# Altium PCB roboARM_PCB_V1I1_1.PcbDoc (part 1 of 2)
Units mm, origin at the board's own origin, x right, y up, seen from the top; angles counter-clockwise.
Board outline 55 x 50 mm, 2 copper layers (Top Layer, Bottom Layer); 48 components, 40 nets, 193 pads, 2135 vias.
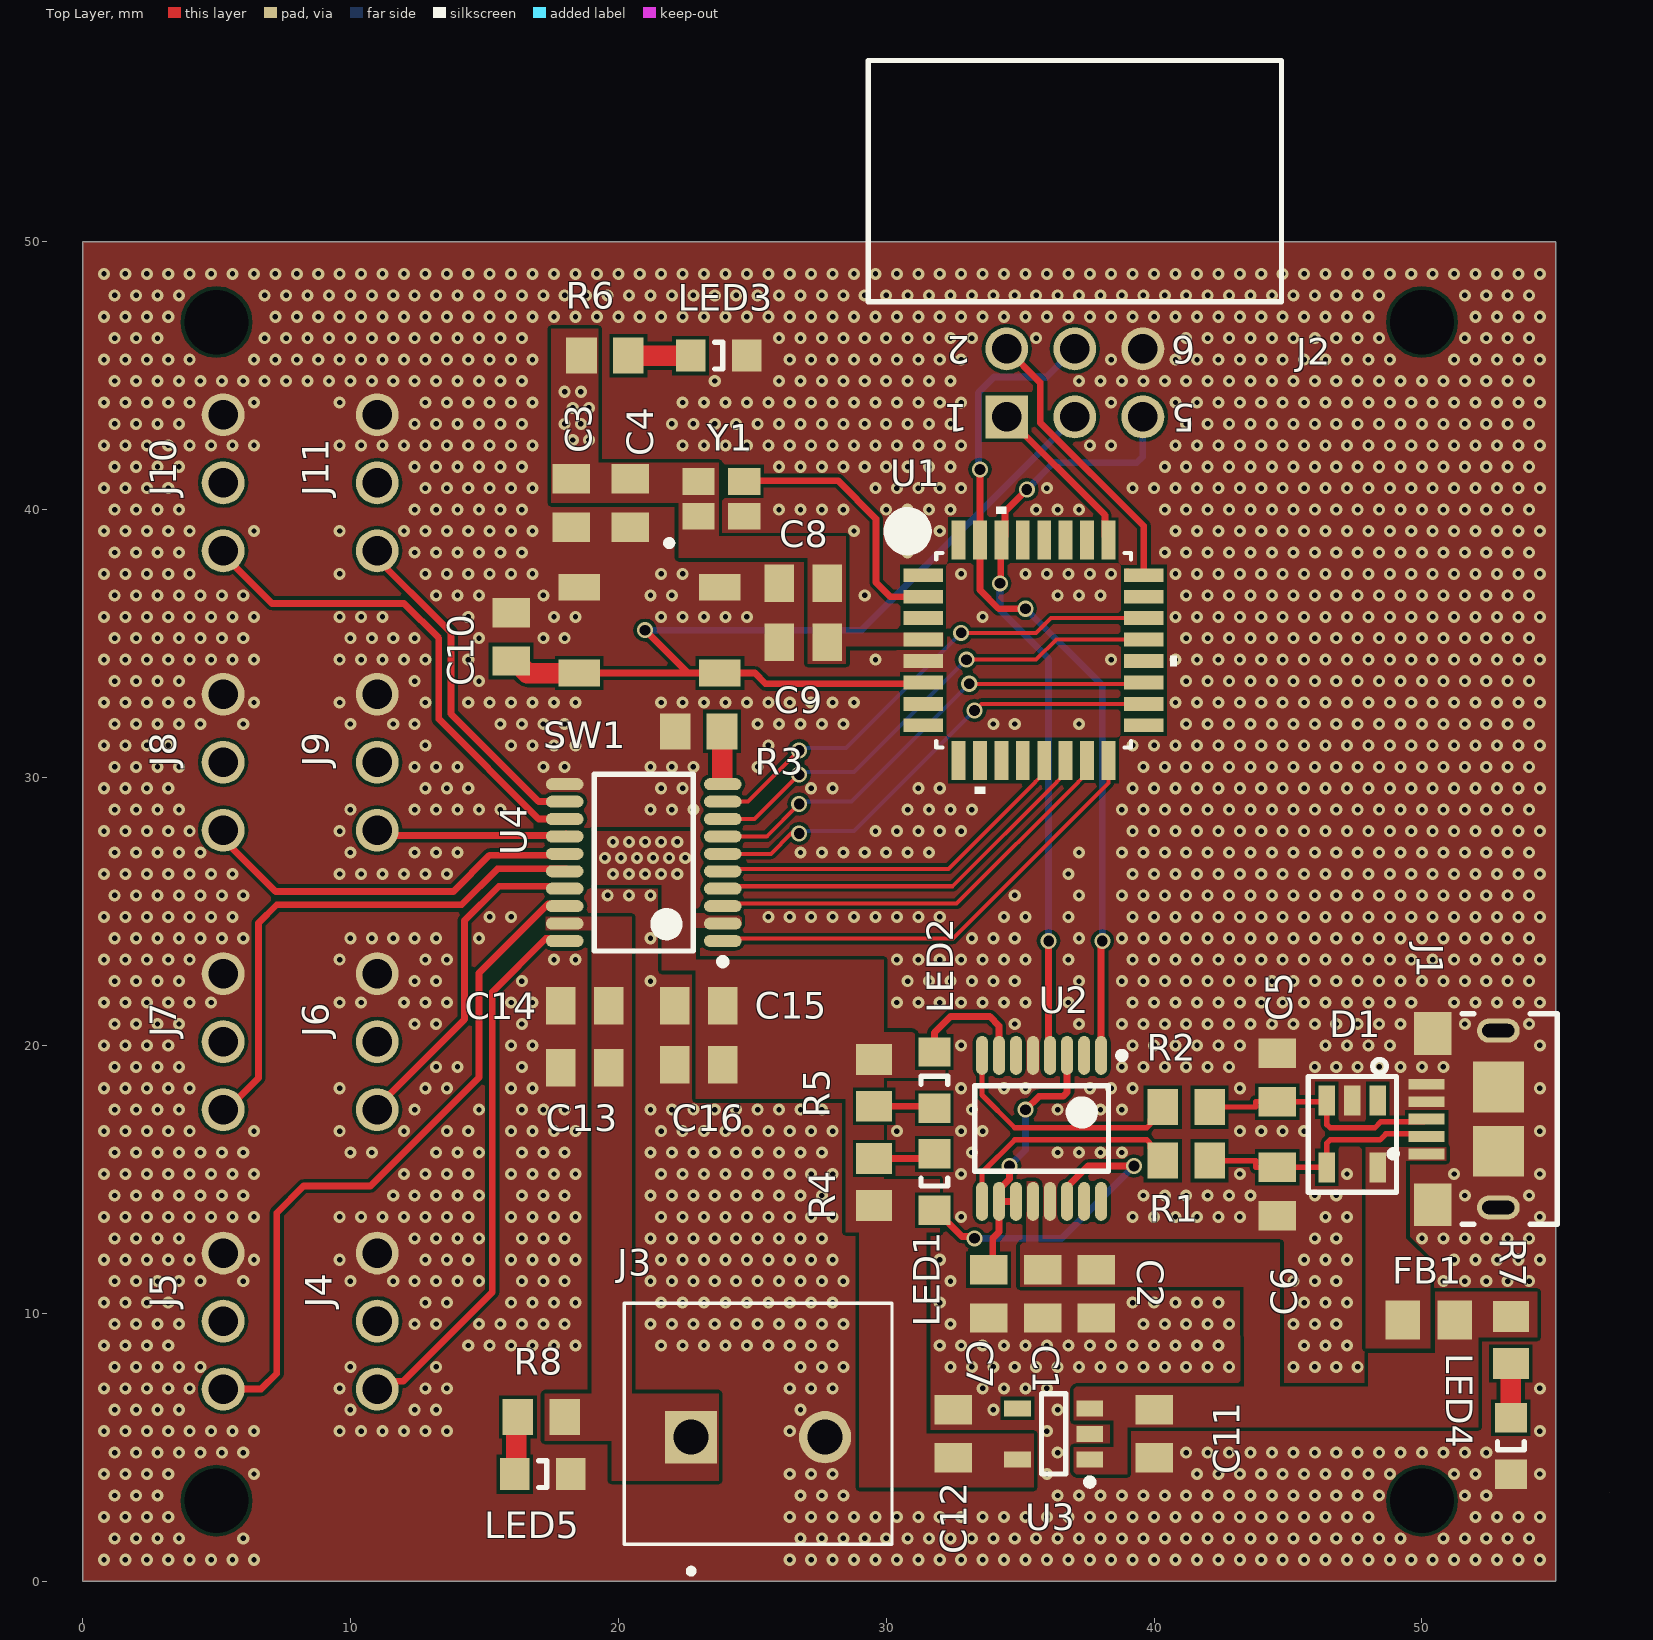
[diagram p0: Top Layer view]
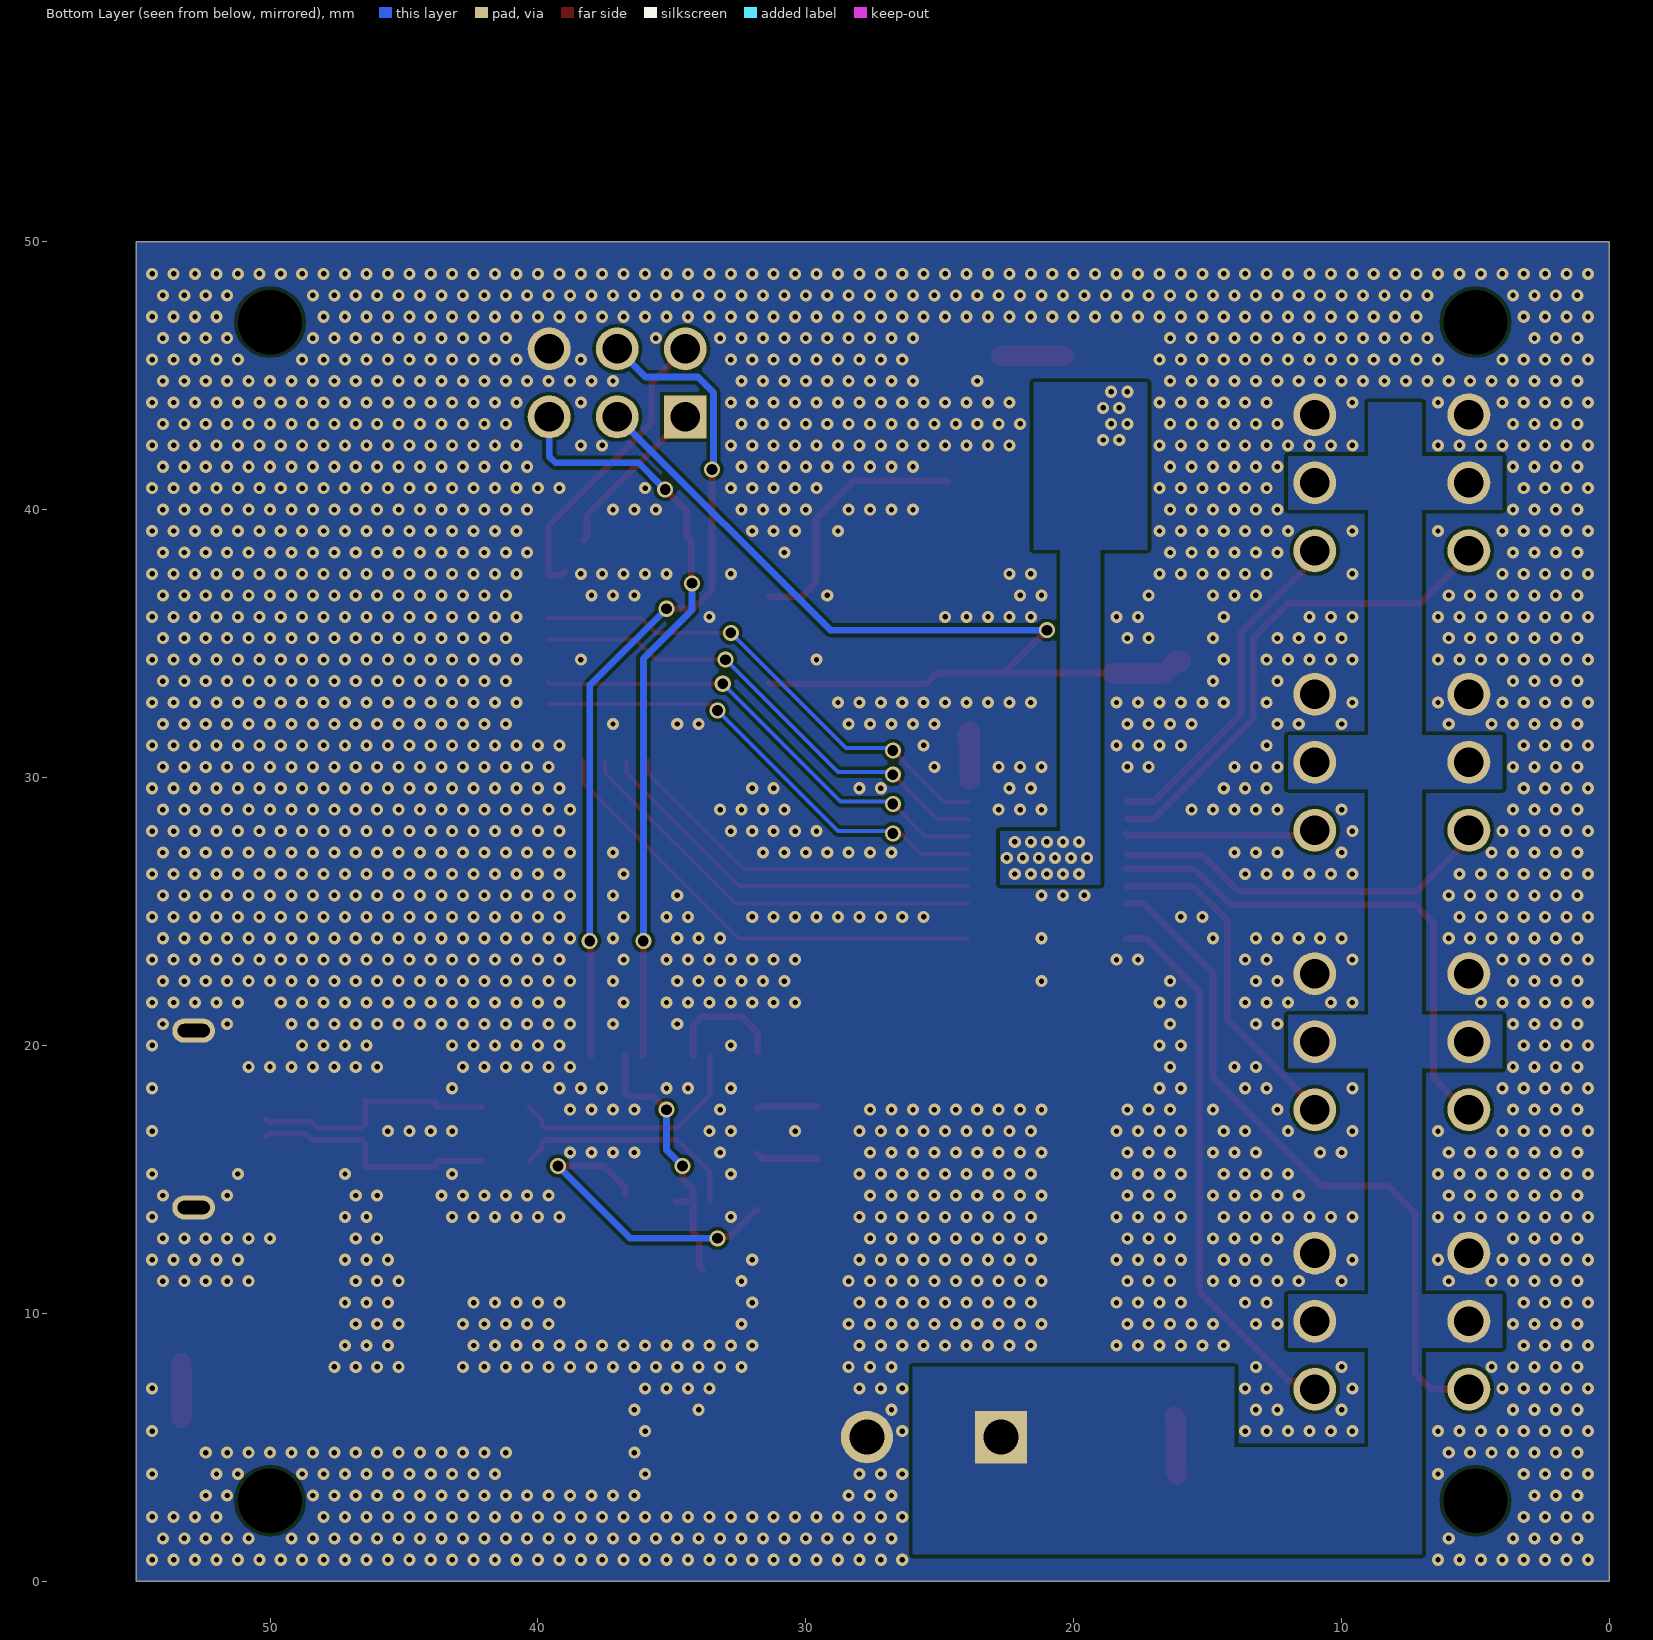
[diagram p1: Bottom Layer view, seen from below]
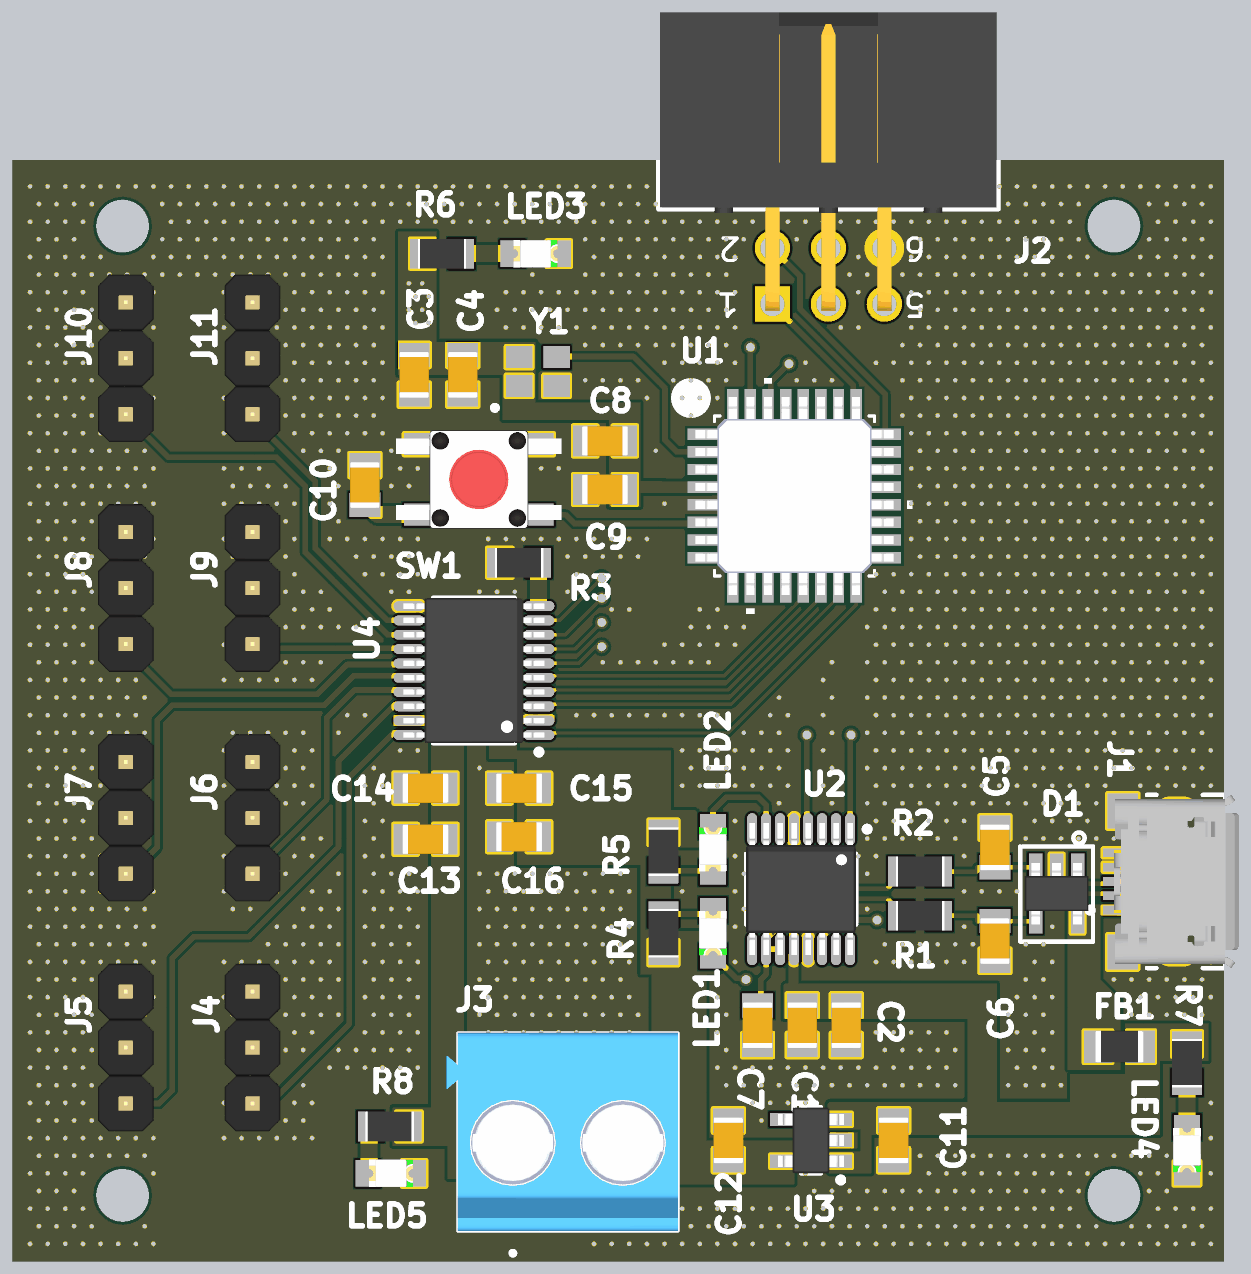
[diagram p2: 3D render of the assembled board from above, using the file's embedded part models]

## Layer stack, top to bottom
Top Solder: solder mask 0.0102, Solder Resist, Dk 3.5
Top Layer: signal copper 0.0356
Dielectric 1: dielectric 0.32, FR-4, Dk 4.8
Bottom Layer: signal copper 0.0356
Bottom Solder: solder mask 0.0102, Solder Resist, Dk 3.5

## Board outline
0,0 0,50 55,50 55,0

## Design rules (kind name [scope] priority, off if disabled: settings)
Clearance [All] p1: gap=0.127 ignorepadtopadclearanceinfootprint=FALSE
DiffPairsRouting [All] p1: maxlimit=0.254 minlimit=0.127 mostfreqgap=0.254 toplayer_minwidth=0.2 toplayer_maxwidth=0.9 toplayer_prefwidth=0.8 bottomlayer_minwidth=0.2 bottomlayer_maxwidth=0.9 bottomlayer_prefwidth=0.8 maxuncoupledlength=12.7
HoleSize [All] p1: absolutevalues=TRUE maxlimit=6.3 minlimit=0.2 maxpercent=80.000 minpercent=20.000
MinimumSolderMaskSliver [All] p1: minsoldermaskwidth=0.016
PlaneConnect [All] p1: planeconnectstyle=Direct reliefexpansion=0.508 reliefentries=4 reliefconductorwidth=0.254 reliefairgap=0.254
PolygonConnect [All] p1: connectstyle=Direct reliefconductorwidth=0.254 reliefentries=4 polygonreliefangle="90 Angle" airgapwidth=0.254
RoutingVias [All] p1: holewidth=0.4 width=0.6 viastyle="Through Hole" minholewidth=0.2 minwidth=0.45 maxholewidth=0.6 maxwidth=1.27
SilkToSilkClearance [All] p1: silktosilkclearance=0.18
SilkToSolderMaskClearance [IsPad] p1: minsilkscreentomaskgap=0.018 clearancetoexposedcopper=TRUE
SolderMaskExpansion [All] p1: expansion=0.102
Width [All] p1: maxlimit=0.768 minlimit=0.15 preferedwidth=0.254
24 further rules are at their usual default settings.

## Classes and differential pairs
differential pair USB: +USB_P -USB_N
differential pair USB_PRE: +USB_PRE_P -USB_PRE_N

## Components (designator, comment, footprint, x,y, rotation, side; value= is the part's Value field where it differs from the comment)
C1 "100nF" CAPC2012X10N 35.85,10.725 r90 top
C2 "4.7uF" CAPC2012X10N 37.85,10.725 r90 top
C3 "100nF" CAPC2012X10N 18.239,40.25 r90 top
C4 "4.7uF" CAPC2012X10N 20.444,40.25 r90 top
C5 "47pF" CAPC2012X10N 44.6,18.8 r270 top
C6 "47pF" CAPC2012X10N 44.6,14.55 r90 top
C7 "100nF" CAPC2012X10N 33.825,10.725 r90 top
C8 "100nF" CAPC2012X10N 26.9,37.25 r0 top
C9 "4.7uF" CAPC2012X10N 26.9,35.046 r0 top
C10 "100nF" CAPC2012X10N 16,35.25 r270 top
C11 "CL21B105KOFNNNG" CAPC2012X10N 40,5.5 r90 top
C12 "CL21B105KOFNNNG" CAPC2012X10N 32.5,5.5 r270 top
C13 "100nF" CAPC2012X10N 18.75,19.166 r0 top
C14 "4.7uF" CAPC2012X10N 18.75,21.487 r0 top
C15 "4.7uF" CAPC2012X10N 23,21.487 r0 top
C16 "100nF" CAPC2012X10N 23,19.283 r0 top
D1 "824011" SOT23_5L 47.4,16.7 r270 top
FB1 "600R@100MHz" LIRD-MI0805K601R-10-2_V 50.25,9.75 r0 top
J1 "10118193-0001LF" FCI-10118193-0001LF-5_V 51.5,17.25 r90 top
J2 "3x2 Conn" 61200621721 37.04,52.265 r180 top
J3 "282841-2" CLEMA 24.75,5.25 r0 top value=Value
J4 "ServoConn" 3_POS_PIN 11,9.71 r90 top
J5 "ServoConn" 3_POS_PIN 5.25,9.71 r90 top
J6 "ServoConn" 3_POS_PIN 11,20.14 r90 top
J7 "ServoConn" 3_POS_PIN 5.25,20.14 r90 top
J8 "ServoConn" 3_POS_PIN 5.25,30.57 r90 top
J9 "ServoConn" 3_POS_PIN 11,30.57 r90 top
J10 "ServoConn" 3_POS_PIN 5.25,41 r90 top
J11 "ServoConn" 3_POS_PIN 11,41 r90 top
LED1 "Yellow" LED_0805 31.8,14.9 r90 top
LED2 "Yellow" LED_0805 31.8,18.704 r270 top
LED3 "Yellow" LED_0805 23.75,45.75 r180 top
LED4 "Yellow" LED_0805 53.318,5.05 r90 top
LED5 "Yellow" LED_0805 17.182,4 r180 top
R1 "27" RESC2012X07N 41.2,15.7 r180 top
R2 "27" RESC2012X07N 41.2,17.7 r180 top
R3 "RMCF0805JT1K00" RESC2012X07N 23,31.721 r0 top value=1k
R4 "130" RESC2012X07N 29.55,14.9 r90 top
R5 "130" RESC2012X07N 29.55,18.604 r270 top
R6 "130" RESC2012X07N 19.5,45.75 r0 top
R7 "280" RESC2012X07N 53.318,9 r90 top
R8 "280" RESC2012X07N 17.125,6.129 r0 top
SW1 "BTN" BUTTON 21.171,35.5 r0 top
U1 "STM32G070KB" LQFP-32 35.5,34.75 r0 top value=Value
U2 "FT230XS-R" SOP64P600X175-16N 35.8,16.9 r270 top
U3 "MIC5504-3.3YM5-TR" SOT95P280X145-5N 36.25,5.5 r180 top
U4 "TXS0108EPWR" TSOP65P640X120-20N 20.95,26.825 r180 top
Y1 "32.768KHZ" KX251 23,41.05 r0 top

## Footprints (in the part's own frame and the unit in brackets; to place one, negate y for a bottom-side part, rotate by r counter-clockwise, add the part's x,y. Pads: shape width x height; smd on the part's side, far side on the other; paste and mask are expansions set on the pad)
3_POS_PIN [mm]
  round 1.6 hole 1.1: 1(-2.54,0) 2(0,0) 3(2.54,0)
  body extent -3.81,-1.17 3.81,1.37, height 8.64
61200621721 [mm] "6 pins, right angled, gold plating"
  rect 1.6x1.6 hole 1.1: 1(2.54,8.805)
  round 1.6 hole 1.1: 2(2.54,6.265) 3(0,8.805) 4(0,6.265) 5(-2.54,8.805) 6(-2.54,6.265)
  silkscreen extent -7.72,-4.5 7.72,4.5, body extent -7.64,-4.43 7.64,9.12, height 9.23
BUTTON [mm]
  rect 1.55x1 smd: 1(-2.625,1.6) 2(2.625,1.6) 3(-2.625,-1.6) 4(2.625,-1.6)
  body extent -3.75,-2.25 3.75,2.25, height 3.8
CAPC2012X10N [mm] "Chip Capacitor, 2-Leads, Body 2,00x1,25mm, IPC Medium Density"
  rect 1.1x1.4 smd: 1(-0.9,0) 2(0.9,0)
  body extent -1.05,-0.67 1.05,0.67, height 1
CLEMA [mm]
  rect 1.95x1.95 hole 1.3: 1(-2.032,0.127)
  round 1.95 hole 1.3: 2(2.968,0.127)
  silkscreen extent -4.53,-4.97 5.47,5.13, body extent -5.04,-3.86 5.46,5.13, height 12.5
FCI-10118193-0001LF-5_V [mm] "Micro, USB-B, 5-Leads, Body 7.86x5.05mm, Pitch 0.65 mm"
  rect 0.4x1.35 smd: 1(-1.3,1.325) 2(-0.65,1.325) 3(0,1.325) 4(0.65,1.325) 5(1.3,1.325)
  rect 1.6x1.4 smd: 6(-3.2,1.1) 7(3.2,1.1)
  rect 1.9x1.9 smd: 8(-1.2,-1.35) 9(1.2,-1.35)
  oval 0.9x1.6 hole 0.5 slot 1.2 at 90 deg: 10(-3.3,-1.35) 11(3.3,-1.35)
  silkscreen extent -3.93,-3.55 3.93,2.7, body extent -3.93,-4.16 3.93,1.5, height 2.83
KX251 [mm]
  rect 1.2x1 smd: 1(0,-1.3) 2(1.7,-1.3) 3(1.7,0) 4(0,0)
  silkscreen extent -1.2,-2.4 -1,-2.2, body extent -0.76,-1.91 2.41,0.64, height 1.17
LED_0805 [mm] "Chip LED, 2-Leads, Body 2.0x1.3mm, IPC Medium Density"
  rect 1.1x1.2 smd: 1(-1.05,0) 2(1.05,0)
  silkscreen extent -0.15,-0.5 0.15,0.5, body extent -1,-0.62 1,0.63, height 0.68
LIRD-MI0805K601R-10-2_V [mm] "Chip Bead, 2-Leads, Body 2.2 x1.45 mm"
  rect 1.285x1.47 smd: 1(-0.972,0) 2(0.972,0)
  body extent -1.1,-0.72 1.1,0.73, height 1.1
LQFP-32 [mm]
  rect 1.462x0.517 smd paste+0 mask+0: 1(-4.115,2.8) 2(-4.115,2) 3(-4.115,1.2) 4(-4.115,0.4) 5(-4.115,-0.4) 6(-4.115,-1.2) 7(-4.115,-2) 8(-4.115,-2.8) 17(4.115,-2.8) 18(4.115,-2) 19(4.115,-1.2) 20(4.115,-0.4) 21(4.115,0.4) 22(4.115,1.2) 23(4.115,2) 24(4.115,2.8)
  rect 0.517x1.462 smd paste+0 mask+0: 9(-2.8,-4.115) 10(-2,-4.115) 11(-1.2,-4.115) 12(-0.4,-4.115) 13(0.4,-4.115) 14(1.2,-4.115) 15(2,-4.115) 16(2.8,-4.115) 25(2.8,4.115) 26(2,4.115) 27(1.2,4.115) 28(0.4,4.115) 29(-0.4,4.115) 30(-1.2,4.115) 31(-2,4.115) 32(-2.8,4.115)
  silkscreen extent -5.15,-5.35 5.35,5.35, body extent -4.5,-4.5 4.5,4.5, height 1.56
RESC2012X07N [mm] "Chip Resistor, 2-Leads, Body 2,00x1,25mm, IPC Medium Density"
  rect 1.15x1.35 smd: 1(-0.875,0) 2(0.875,0)
  body extent -1.1,-0.67 1.1,0.67, height 0.65
SOP64P600X175-16N [mm] "SOP, 16-Leads, Body 4,90x3,90mm, Pitch 0,64mm, IPC Medium Density"
  oval 1.45x0.45 smd: 1(-2.725,2.222) 2(-2.725,1.587) 3(-2.725,0.952) 4(-2.725,0.317) 5(-2.725,-0.318) 6(-2.725,-0.953) 7(-2.725,-1.588) 8(-2.725,-2.223) 9(2.725,-2.222) 10(2.725,-1.587) 11(2.725,-0.952) 12(2.725,-0.317) 13(2.725,0.318) 14(2.725,0.953) 15(2.725,1.588) 16(2.725,2.223)
  silkscreen extent -2.85,-2.5 1.6,3.12, body extent -3,-2.5 3,2.5, height 1.75
SOT23_5L [mil] "SOT23_5L, 5-Leads, Body 3.60x2.9mm, Pitch 0.95mm"
  rect 44x24 smd: 1(-49.21,37.4) 2(-49.21,0) 3(-49.21,-37.4) 4(49.21,-37.4) 5(49.21,37.4)
  silkscreen extent -109,-65 86,65, body extent -55,-57 55,57, height 44
SOT95P280X145-5N [mm] "SOT23, 5-Leads, Body 2,90x2,80mm, Pitch 0,95mm, IPC Medium Density"
  rect 1x0.6 smd: 1(-1.35,0.95) 2(-1.35,0) 3(-1.35,-0.95) 4(1.35,-0.95) 5(1.35,0.95)
  silkscreen extent -1.48,-1.5 0.45,1.92, body extent -1.5,-1.5 1.5,1.5, height 1.45
TSOP65P640X120-20N [mm] "TSOP, 20-Leads, Body 6,50x4,40mm, Pitch 0,65mm, IPC Medium Density"
  oval 1.4x0.45 smd: 1(-2.95,2.925) 2(-2.95,2.275) 3(-2.95,1.625) 4(-2.95,0.975) 5(-2.95,0.325) 6(-2.95,-0.325) 7(-2.95,-0.975) 8(-2.95,-1.625) 9(-2.95,-2.275) 10(-2.95,-2.925) 11(2.95,-2.925) 12(2.95,-2.275) 13(2.95,-1.625) 14(2.95,-0.975) 15(2.95,-0.325) 16(2.95,0.325) 17(2.95,0.975) 18(2.95,1.625) 19(2.95,2.275) 20(2.95,2.925)
  silkscreen extent -3.08,-3.3 1.85,3.82, body extent -3.2,-3.3 3.2,3.3, height 1.2

## Part data
C1 C3 C7 C8 C10 C13 C16: library part GCD21BR72A104KA01L, "CAP CER 0.1UF 100V X7R 0805", Manufacturer 1=Murata, Supplier Part Number 1=490-14407-1-ND, ComponentLink1Description=http://search.murata.co.jp/Ceramy/image/img/A01X/partnumbering_e_02.pdf?src-supplier=Digi-Key, ComponentLink1URL=http://search.murata.co.jp/Ceramy/image/img/A01X/partnumbering_e_02.pdf?src-supplier=Digi-Key, ComponentLink2Description=http://search.murata.co.jp/Ceramy/image/img/A01X/G101/ENG/GCD21BR72A104KA01-01.pdf?src-supplier=Digi-Key, ComponentLink2URL=http://search.murata.co.jp/Ceramy/image/img/A01X/G101/ENG/GCD21BR72A104KA01-01.pdf?src-supplier=Digi-Key, Manufacturer Part Number 1=GCD21BR72A104KA01L, Pricing 1="1=0,23000, 10=0,15700, 100=0,08890, 500=0,06278, 1000=0,05494 (USD)", RoHS=No, Stock 1=24933, Supplier 1=Digi-Key
C2 C4 C9 C14 C15: library part GRM21BR61H475KE51L, "Cap Ceramic 4.7uF 50V X5R 10% SMD 0805 85C Embossed T/R", Case/Package=0805, Case Code (Metric)=2012, Dielectric=X5R, Manufacturer 1=Murata, Max Operating Temperature=85°C, Min Operating Temperature=-55°C, Supplier Part Number 1=490-10751-1-ND, Tolerance=10%, Voltage Rating=50V, Capacitance=4.7uF, Case Code (Imperial)=0805, ComponentLink1Description=http://components.arrow.com/part/dataview/61084395S454511N2606?src-supplier=Arrow, ComponentLink1URL=http://components.arrow.com/part/dataview/61084395S454511N2606?src-supplier=Arrow, ComponentLink2Description=http://components.arrow.com/part/dataview/0323_07281654?src-supplier=Arrow+Europe, ComponentLink2URL=http://components.arrow.com/part/dataview/0323_07281654?src-supplier=Arrow+Europe, ComponentLink3Description=http://www.farnell.com/datasheets/2079186.pdf?src-supplier=Farnell, ComponentLink3URL=http://www.farnell.com/datasheets/2079186.pdf?src-supplier=Farnell, ComponentLink4Description=https://search.murata.co.jp/Ceramy/image/img/A01X/G101/ENG/GRM21BR61H475KE51-01.pdf?src-supplier=Digi-Key, ComponentLink4URL=https://search.murata.co.jp/Ceramy/image/img/A01X/G101/ENG/GRM21BR61H475KE51-01.pdf?src-supplier=Digi-Key, ComponentLink5Description=http://search.murata.co.jp/Ceramy/image/img/A01X/G101/ENG/GRM21BR61H475KE51-01.pdf?src-supplier=Digi-Key, ComponentLink5URL=http://search.murata.co.jp/Ceramy/image/img/A01X/G101/ENG/GRM21BR61H475KE51-01.pdf?src-supplier=Digi-Key, ComponentLink6Description=http://www.farnell.com/datasheets/2079186.pdf?src-supplier=Element14, ComponentLink6URL=http://www.farnell.com/datasheets/2079186.pdf?src-supplier=Element14, ComponentLink7Description=http://www.farnell.com/datasheets/2079186.pdf?src-supplier=Newark, ComponentLink7URL=http://www.farnell.com/datasheets/2079186.pdf?src-supplier=Newark, Depth=1.25mm, Height=1.25mm, Lead Free="Lead Free", Length=2mm, Manufacturer Part Number 1=GRM21BR61H475KE51L, Material=Ceramic, Mount="Surface Mount", Packaging="Tape and Reel", Pricing 1="1=0,37000, 10=0,25600, 100=0,15390, 500=0,11540, 1000=0,09745 (USD)", REACH SVHC="No SVHC", RoHS=Yes, Stock 1=400593, Supplier 1=Digi-Key, Thickness=0.055inch, Voltage Rating (DC)=50V, Width=0.049inch
C5 C6: library part GRM21A5C2D470JW01D, "Murata 47pF Multilayer Ceramic Capacitor (MLCC) 200 V 5% C0G dielectric GRM SMD max op. temp. +125C", Case/Package=0805, Case Code (Metric)=2012, Dielectric=C0G, Dielectric Material=Ceramic, Manufacturer 1=Murata, Max Operating Temperature=125°C, Min Operating Temperature=-55°C, Package Quantity=4000, Supplier Part Number 1=490-14653-1-ND, Temperature Coefficient=30ppm/°C, Tolerance=5%, Voltage=200V, Capacitance=47pF, Case Code (Imperial)=0805, ComponentLink1Description=http://www.mouser.com/ds/2/281/c02e-2905.pdf?src-supplier=Mouser, ComponentLink1URL=http://www.mouser.com/ds/2/281/c02e-2905.pdf?src-supplier=Mouser, ComponentLink2Description=https://search.murata.co.jp/Ceramy/image/img/A01X/G101/ENG/GRM21A5C2D470JW01-01.pdf?src-supplier=Digi-Key, ComponentLink2URL=https://search.murata.co.jp/Ceramy/image/img/A01X/G101/ENG/GRM21A5C2D470JW01-01.pdf?src-supplier=Digi-Key, ComponentLink3Description=http://search.murata.co.jp/Ceramy/image/img/A01X/G101/ENG/GRM21A5C2D470JW01-01.pdf?src-supplier=Digi-Key, ComponentLink3URL=http://search.murata.co.jp/Ceramy/image/img/A01X/G101/ENG/GRM21A5C2D470JW01-01.pdf?src-supplier=Digi-Key, Composition=Ceramic, Depth=1.25mm, Height=1mm, Length=2mm, Manufacturer Part Number 1=GRM21A5C2D470JW01D, Mount="Surface Mount", Packaging="Tape and Reel", Pricing 1="1=0,31000, 10=0,21300, 100=0,12080, 500=0,08530, 1000=0,07463 (USD)", RoHS=Yes, Stock 1=11086, Supplier 1=Digi-Key, Termination=SMD/SMT, Thickness=0.051inch, Voltage Rating=200V, Voltage Rating (DC)=200V, Weight=0.000335oz, Width=0.049inch
C11 C12: "Cap Ceramic 1uF 16V X7R 10% SMD 0805 125C Embossed T/R", Capacitance=1uF, Case/Package=0805, Case Code (Metric)=2012, Dielectric=X7R, Manufacturer=Samsung, Max Operating Temperature=125°C, Min Operating Temperature=-55°C, Package Quantity=3000, Supplier Part Number 1=1276-6471-1-ND, Tolerance=10%, Voltage=16V, Case Code (Imperial)=0805, ComponentLink1Description=http://www.samsungsem.com/global/support/library/product-catalog/__icsFiles/afieldfile/2014/11/13/MLCC.pdf?src-supplier=Digi-Key, ComponentLink1URL=http://www.samsungsem.com/global/support/library/product-catalog/__icsFiles/afieldfile/2014/11/13/MLCC.pdf?src-supplier=Digi-Key, ComponentLink2Description=http://www1.futureelectronics.com/doc/SAMSUNG%20PASSIVE/CL05B104KQ5NNNC.pdf?src-supplier=Future+Electronics, ComponentLink2URL=http://www1.futureelectronics.com/doc/SAMSUNG%20PASSIVE/CL05B104KQ5NNNC.pdf?src-supplier=Future+Electronics, ComponentLink3Description=https://www.distrelec.biz/Web/Downloads/_e/ng/MLCC_CatalogDownload2013_ENG.pdf?mime=application%2Fpdf&src-supplier=Distrelec, ComponentLink3URL=https://www.distrelec.biz/Web/Downloads/_e/ng/MLCC_CatalogDownload2013_ENG.pdf?mime=application%2Fpdf&src-supplier=Distrelec, ComponentLink4Description=https://produktinfo.conrad.com/datenblaetter/450000-474999/455935-da-01-en-VS_KONDENSATOR_0805.pdf?src-supplier=Conrad, ComponentLink4URL=https://produktinfo.conrad.com/datenblaetter/450000-474999/455935-da-01-en-VS_KONDENSATOR_0805.pdf?src-supplier=Conrad, Depth=1.25mm, Height=1.25mm, Lead Free="Lead Free", Length=2mm, Manufacturer Part Number=CL21B105KOFNNNG, Material=Ceramic, Mount="Surface Mount", Packaging="Tape and Reel", Pricing 1="1=0.1, 10=0.047, 100=0.0211, 500=0.0151, 1000=0.0119 (USD)", Stock 1=433201, Supplier 1=Digi-Key, Thickness=0.053inch, Voltage Rating=16V, Width=0.049inch
D1: library part CMP-1474-00002-1, "TVS Diode WE-TVS-HS, VRWM=5V", Breakdown Voltage=6.1V, Capacitance=2pF, Case/Package=SOT-23, Clamping Voltage=8.5V, Manufacturer="Wuerth Elektronik", Manufacturer 1="Wurth Electronics", Max Operating Temperature=125°C, Max Reverse Leakage Current=5A, Max Surge Current=12A, Min Operating Temperature=-55°C, Operating Supply Voltage=6V, Package Quantity=3000, Power Line Protection=Yes, Reverse Stand Off Voltage=5V, Supplier Part Number 1=732-4465-1-ND, Test Current=1mA, ComponentLink1Description="Manufacturer URL", ComponentLink1URL=http://www.we-online.com, ComponentLink2Description=Datasheet, ComponentLink2URL=http://katalog.we-online.de/kataloge/eisos/media/pdf/824011.pdf, ComponentLink3Description=https://datasheet.ciiva.com/1280/824011-1280657.pdf?src-supplier=Farnell, ComponentLink3URL=https://datasheet.ciiva.com/1280/824011-1280657.pdf?src-supplier=Farnell, ComponentLink4Description=https://datasheet.ciiva.com/15063/824011-15063932.pdf?src-supplier=Digi-Key, ComponentLink4URL=https://datasheet.ciiva.com/15063/824011-15063932.pdf?src-supplier=Digi-Key, ComponentLink5Description=https://datasheet.ciiva.com/25624/0900766b8107e9bf-25624781.pdf?src-supplier=RSComponents, ComponentLink5URL=https://datasheet.ciiva.com/25624/0900766b8107e9bf-25624781.pdf?src-supplier=RSComponents, ComponentLink6Description=https://datasheet.ciiva.com/1276/824011-1276092.pdf?src-supplier=Element14, ComponentLink6URL=https://datasheet.ciiva.com/1276/824011-1276092.pdf?src-supplier=Element14, ComponentLink7Description=https://datasheet.ciiva.com/15063/824011-15063933.pdf?src-supplier=Digi-Key, ComponentLink7URL=https://datasheet.ciiva.com/15063/824011-15063933.pdf?src-supplier=Digi-Key, ComponentLink8Description=https://datasheet.ciiva.com/15063/824011-15063934.pdf?src-supplier=Digi-Key, ComponentLink8URL=https://datasheet.ciiva.com/15063/824011-15063934.pdf?src-supplier=Digi-Key, Direction=Unidirectional, ESD Protection=Yes, Height=1.16mm, Length=2.9mm, Manufacturer Part Number 1=824011, Max Breakdown Voltage=6.1V, Min Breakdown Voltage=6.1V, Mount="Surface Mount", Number of Bidirectional Channels=2, Number of Channels=2, Number of Pins=5, PackageReference=SOT23_5L, Packaging="Tape and Reel", PartNumber=824011, Peak Pulse Current=12A, Polarity=Bidirectional, Pricing 1="1=0,85000, 10=0,80600, 50=0,75300, 100=0,69900, 500=0,61800 (USD)", REACH SVHC=Unknown, Reverse Standoff Voltage=5V, RoHS=Yes, Stock 1=4096, Supplier 1=Digi-Key, Termination=SMD/SMT, Width=2.8mm, Working Voltage=5V
FB1: library part MI0805K601R-10, "FERRITE BEAD 600 OHM 0805 1LN", Case/Package=0805, Case Code (Metric)=2012, Current Rating=1.5A, DC Resistance (DCR)=100mR, Frequency=100MHz, Manufacturer 1=Laird, Max Operating Temperature=125°C, Min Operating Temperature=-40°C, Package Quantity=1, Supplier Part Number 1=240-2390-1-ND, Case Code (Imperial)=0805, ComponentLink1Description=https://datasheet.ciiva.com/22650/1685918-22650417.pdf?src-supplier=Element14, ComponentLink1URL=https://datasheet.ciiva.com/22650/1685918-22650417.pdf?src-supplier=Element14, ComponentLink2Description=https://datasheet.ciiva.com/3082/mi0805k601r-10-a-vp-3082219.pdf?src-supplier=Avnet, ComponentLink2URL=https://datasheet.ciiva.com/3082/mi0805k601r-10-a-vp-3082219.pdf?src-supplier=Avnet, ComponentLink3Description=https://datasheet.ciiva.com/1013/mi0805k601r-10-b-1013299.pdf?src-supplier=Digi-Key, ComponentLink3URL=https://datasheet.ciiva.com/1013/mi0805k601r-10-b-1013299.pdf?src-supplier=Digi-Key, Contact Plating=Tin,Matte, Core Material=Ferrite, Depth=1.45mm, Height=0.043inch, Impedance=600R, Lead Free="Lead Free", Length=2mm, Manufacturer Part Number 1=MI0805K601R-10, Material=Ferrite, Max Current Rating=1.5A, Max DC Current=1.5A, Mount="Surface Mount", Number of Lines=1, Packaging="Tape and Reel", Pricing 1="1=0,20000, 10=0,16400, 25=0,12800, 50=0,10600, 100=0,09130, 250=0,07304, 500=0,06574, 1000=0,05478 (USD)", REACH SVHC=Unknown, RoHS=Yes, Stock 1=98142, Supplier 1=Digi-Key, Termination=SMD/SMT, Test Frequency=100MHz, Weight=0.00392oz, Width=0.049inch
J1: library part CMP-2000-05119-1, "Micro USB B Type Receptacle, -55 to 85 degC, 5-Pin SMD, RoHS, Tape and Reel", Color=Black, Current Rating=1.8A, Flammability Rating=UL94V-0, Insulation Resistance=1000MOhms, Manufacturer=FCI, Manufacturer 1="Amphenol FCI", Max Operating Temperature=85°C, Max Voltage Rating (AC)=100V, Min Operating Temperature=-55°C, Operating Temperature Range=-55Cto+85C, Package Quantity=1200, Supplier Part Number 1=609-4616-1-ND, Brand=FCI, ComponentLink1Description=https://datasheet.ciiva.com/851/10118193-851106.pdf?src-supplier=Digi-Key, ComponentLink1URL=https://datasheet.ciiva.com/851/10118193-851106.pdf?src-supplier=Digi-Key, ComponentLink2Description=https://datasheet.ciiva.com/14802/10118193-0001lf-webpage-14802386.pdf?src-supplier=Arrow, ComponentLink2URL=https://datasheet.ciiva.com/14802/10118193-0001lf-webpage-14802386.pdf?src-supplier=Arrow, ComponentLink3Description=https://datasheet.ciiva.com/26853/getdatasheetpartid-418618-26853893.pdf?src-supplier=Verical, ComponentLink3URL=https://datasheet.ciiva.com/26853/getdatasheetpartid-418618-26853893.pdf?src-supplier=Verical, ComponentLink4Description=https://datasheet.ciiva.com/4598/10118193ac-197151-4598799.pdf?src-supplier=Mouser, ComponentLink4URL=https://datasheet.ciiva.com/4598/10118193ac-197151-4598799.pdf?src-supplier=Mouser, ComponentLink5Description=https://datasheet.ciiva.com/851/10118193-851107.pdf?src-supplier=Digi-Key, ComponentLink5URL=https://datasheet.ciiva.com/851/10118193-851107.pdf?src-supplier=Digi-Key, ComponentLink6Description=https://datasheet.ciiva.com/851/10118193-851108.pdf?src-supplier=Digi-Key, ComponentLink6URL=https://datasheet.ciiva.com/851/10118193-851108.pdf?src-supplier=Digi-Key, ComponentLink7Description=https://datasheet.ciiva.com/14618/70236827-14618887.pdf?src-supplier=Allied+Electronics, ComponentLink7URL=https://datasheet.ciiva.com/14618/70236827-14618887.pdf?src-supplier=Allied+Electronics, Connector Type=MicroUSBTypeBreceptacle, Contact Material=CopperAlloy, Contact Plating=Gold, Datasheet URL=http://datasheet.octopart.com/10118193-0001LF-FCI-datasheet-55953155.pdf, Datasheet Version="Rev. C, 05/2015", Depth=5.67mm, Factory Pack Quantity=1200, Features=Shielded, Gender=Female, Housing Material=Polymer, Length=7.86mm, Manufacturer Part Number 1=10118193-0001LF, Manufacturer URL=http://www.fci.com/, Mount="Surface Mount,Horizontal", Mounting Angle=Right, Number of Contacts=5Contact, Number of Ports=1, Number of Terminals=5, Orientation="Right Angle", Packaging=Reel, Pitch=0.65mm, Pricing 1="1=0,43000, 10=0,40500, 25=0,36440, 50=0,32400, 100=0,31040, 250=0,28344, 500=0,26994 (USD)", Product=MicroUSBTypeBConnectors, Product Category=USBConnectors, Radiation Hardening=No, RoHS=Details, Standard=USB2.0, Stock 1=33205, Supplier 1=Digi-Key, Termination=Solder, Termination Style=SMD/SMT, Voltage Rating=100V
J2: library part 61200621721, "WURTH ELEKTRONIK         61200621721            Wire-To-Board Connector, WR-BHD Series, Through Hole, Header, 6 Contacts, 2.54 mm", Color=Black, Manufacturer 1="Wurth Electronics", Supplier Part Number 1=732-5404-ND, ComponentLink1Description=https://datasheet.ciiva.com/28391/76598-28391952.pdf?src-supplier=Element14, ComponentLink1URL=https://datasheet.ciiva.com/28391/76598-28391952.pdf?src-supplier=Element14, Connector Type="Male Pin", Contact Material=Copper, Contact Plating=Gold, Gender=Male, Manufacturer Part Number 1=61200621721, Mount="Through Hole", Number of Contacts=6, Number of Positions=6, Number of Rows=2, Packaging=Tray, Pitch=0.1inch, Pricing 1="1=1,09000, 10=1,05000, 50=0,92200, 100=0,79500, 360=0,66800, 720=0,57300 (USD)", REACH SVHC=Unknown, RoHS=Yes, Row Spacing=0.1inch, Stock 1=1980, Supplier 1=Digi-Key, Termination=Solder
J3: "No Description Available", Manufacturer 1=CUI, Manufacturer Part Number 1=TB001-500-02BE, Supplier Part Number 1=102-6134-ND, Built_By=EMA_UL_Team, Copyright="Copyright (C) 2016 Accelerated Designs. All rights reserved", Manufacturer_Part_Number=282841-2, Pricing 1="1=0,59000, 10=0,32200, 25=0,24040, 50=0,21420, 100=0,21000, 250=0,18480, 500=0,16800, 1000=0,15120, 5000=0,11340 (USD)", RefDes=RefDes, RoHS=No, Stock 1=347, Supplier 1=Digi-Key, Type=DEV, Vendor="TE Connectivity"
J4 J5 J6 J7 J8 J9 J10 J11: library part PR20203VBNN, "CONN HEADER VERT 3POS 2.54MM", Manufacturer 1="METZ CONNECT", Supplier Part Number 1=1849-1003-ND, ComponentLink1Description=https://www.metz-connect.com/us/system/files/productfiles/Data_sheet_PR202XXVBNN_PR202XXVBNN_OFF-024022P.pdf?src-supplier=Digi-Key, ComponentLink1URL=https://www.metz-connect.com/us/system/files/productfiles/Data_sheet_PR202XXVBNN_PR202XXVBNN_OFF-024022P.pdf?src-supplier=Digi-Key, ComponentLink2Description=http://www.farnell.com/datasheets/2372088.pdf?src-supplier=Newark, ComponentLink2URL=http://www.farnell.com/datasheets/2372088.pdf?src-supplier=Newark, Manufacturer Part Number 1=PR20203VBNN, Pricing 1="1=0,10000, 10=0,05600, 100=0,03480, 500=0,02880, 1000=0,02520, 5000=0,02160, 10000=0,02100 (USD)", RoHS=No, Stock 1=3993, Supplier 1=Digi-Key
LED1 LED2 LED3 LED4 LED5: library part CMP-1426-00012-1, "SMD mono-color Chip LED, WL-SMCW, Yellow", Case/Package=0805, Case Code (Metric)=2012, Forward Current=30mA, Forward Voltage=2V, Manufacturer="Wuerth Elektronik", Manufacturer 1="Wurth Electronics", Manufacturer Part Number 1=150080YS75000, Max Operating Temperature=85°C, Min Operating Temperature=-40°C, Package Quantity=4000, Supplier Part Number 1=732-4987-1-ND, Test Current=20mA, Case Code (Imperial)=0805, Color=Yellow, ComponentLink1Description="Manufacturer URL", ComponentLink1URL=http://www.we-online.com, ComponentLink2Description=Datasheet, ComponentLink2URL=http://katalog.we-online.com/led/datasheet/150080YS75000.pdf, ComponentLink3Description=https://datasheet.ciiva.com/23843/150080ys75000-23843256.pdf?src-supplier=Newark, ComponentLink3URL=https://datasheet.ciiva.com/23843/150080ys75000-23843256.pdf?src-supplier=Newark, ComponentLink4Description=https://datasheet.ciiva.com/29279/759438-da-01-en-chipled-0805-w-kl-gelb-150080ys75000-29279034.pdf?src-supplier=Conrad, ComponentLink4URL=https://datasheet.ciiva.com/29279/759438-da-01-en-chipled-0805-w-kl-gelb-150080ys75000-29279034.pdf?src-supplier=Conrad, ComponentLink5Description=https://datasheet.ciiva.com/22656/1911353-22656971.pdf?src-supplier=Element14, ComponentLink5URL=https://datasheet.ciiva.com/22656/1911353-22656971.pdf?src-supplier=Element14, ComponentLink6Description=https://datasheet.ciiva.com/29563/150080ys75000-29563019.pdf?src-supplier=Digi-Key, ComponentLink6URL=https://datasheet.ciiva.com/29563/150080ys75000-29563019.pdf?src-supplier=Digi-Key, ComponentLink7Description=https://datasheet.ciiva.com/29563/150080ys75000-29563020.pdf?src-supplier=Digi-Key, ComponentLink7URL=https://datasheet.ciiva.com/29563/150080ys75000-29563020.pdf?src-supplier=Digi-Key, ComponentLink8Description=https://datasheet.ciiva.com/29563/150080ys75000-29563021.pdf?src-supplier=Digi-Key, ComponentLink8URL=https://datasheet.ciiva.com/29563/150080ys75000-29563021.pdf?src-supplier=Digi-Key, Dominant Wavelength=590nm, Height=0.7mm, Length=2mm, Lens Style=Clear,Rectangular, Luminous Intensity=120mcd, Mount="Surface Mount", PackageReference=0805_A, Packaging="Tape and Reel", PartNumber=150080YS75000, Pricing 1="1=0,18000, 50=0,16500, 100=0,14200, 500=0,12300 (USD)", REACH SVHC=Unknown, RoHS=Yes, Stock 1=14510, Supplier 1=Digi-Key, Viewing Angle=140°, Wavelength=590nm, Width=1.25mm
R1 R2: library part RMCF0805FT27R0, "RES 27 OHM 1/8W 1% 0805", Case/Package=0805, Case Code (Metric)=2012, Manufacturer 1="Stackpole Electronics", Max Operating Temperature=155°C, Max Power Dissipation=125mW, Min Operating Temperature=-55°C, Package Quantity=5000, Resistance=27R, Supplier Part Number 1=RMCF0805FT27R0CT-ND, Temperature Coefficient=100ppm/°C, Tolerance=1%, Case Code (Imperial)=0805, ComponentLink1Description=https://www.seielect.com/catalog/SEI-Packaging.pdf?src-supplier=Digi-Key, ComponentLink1URL=https://www.seielect.com/catalog/SEI-Packaging.pdf?src-supplier=Digi-Key, ComponentLink2Description=https://www.seielect.com/catalog/SEI-RMCF_RMCP.pdf?src-supplier=Avnet, ComponentLink2URL=https://www.seielect.com/catalog/SEI-RMCF_RMCP.pdf?src-supplier=Avnet, ComponentLink3Description=https://www.seielect.com/Catalog/SEI-RMCF_RMCP.pdf?src-supplier=Digi-Key, ComponentLink3URL=https://www.seielect.com/Catalog/SEI-RMCF_RMCP.pdf?src-supplier=Digi-Key, ComponentLink4Description=http://www.seielect.com/Catalog/SEI-RMCF_RMCP.pdf?src-supplier=Digi-Key, ComponentLink4URL=http://www.seielect.com/Catalog/SEI-RMCF_RMCP.pdf?src-supplier=Digi-Key, Composition="Thick Film", Contact Plating=Tin,Matte, Features="Automotive AEC-Q200", Height=0.026inch, Lead Free="Lead Free", Length=0.079inch, Manufacturer Part Number 1=RMCF0805FT27R0, Mount="Surface Mount", Number of Terminations=2, Packaging="Tape and Reel", Pricing 1="1=0,10000, 10=0,02700, 100=0,01090, 1000=0,00490, 2500=0,00425 (USD)", Radiation Hardening=No, RoHS=Yes, Stock 1=37447, Supplier 1=Digi-Key, Width=0.049inch
R3: "RES 1K OHM 5% 1/8W 0805", Case/Package=0805, Case Code (Metric)=2012, Manufacturer="Stackpole Electronics", Max Operating Temperature=155°C, Max Power Dissipation=125mW, Min Operating Temperature=-55°C, Resistance=1kR, Supplier Part Number 1=RMCF0805JT1K00CT-ND, Temperature Coefficient=100ppm/°C, Tolerance=5%, Case Code (Imperial)=0805, ComponentLink1Description=https://www.verical.com/server-webapp/html/getDatasheet?partID=362050&src-supplier=Verical, ComponentLink1URL=https://www.verical.com/server-webapp/html/getDatasheet?partID=362050&src-supplier=Verical, ComponentLink2Description=https://www.seielect.com/catalog/SEI-RMCF_RMCP.pdf?src-supplier=Avnet, ComponentLink2URL=https://www.seielect.com/catalog/SEI-RMCF_RMCP.pdf?src-supplier=Avnet, ComponentLink3Description=http://www.seielect.com/catalog/sei-rmc.pdf?src-supplier=Future+Electronics, ComponentLink3URL=http://www.seielect.com/catalog/sei-rmc.pdf?src-supplier=Future+Electronics, ComponentLink4Description=https://www.seielect.com/catalog/SEI-Packaging.pdf?src-supplier=Digi-Key, ComponentLink4URL=https://www.seielect.com/catalog/SEI-Packaging.pdf?src-supplier=Digi-Key, ComponentLink5Description=http://components.arrow.com/part/dataview/50503305S7171764N1174?src-supplier=Arrow, ComponentLink5URL=http://components.arrow.com/part/dataview/50503305S7171764N1174?src-supplier=Arrow, ComponentLink6Description=https://www.seielect.com/Catalog/SEI-RMCF_RMCP.pdf?src-supplier=Digi-Key, ComponentLink6URL=https://www.seielect.com/Catalog/SEI-RMCF_RMCP.pdf?src-supplier=Digi-Key, Composition="Thick Film", Contact Plating=Tin,Matte, Depth=1.25mm, Features="Automotive AEC-Q200", Height=0.026inch, Lead Free="Lead Free", Length=2mm, Manufacturer Part Number=RMCF0805JT1K00, Military Standard=Not, Mount="Surface Mount", Number of Terminations=2, Packaging="Tape and Reel", Power Rating=125mW, Pricing 1="1=0.1, 10=0.02, 100=0.0082, 1000=0.0037, 2500=0.0032 (USD)", Radiation Hardening=No, Stock 1=1042028, Supplier 1=Digi-Key, Width=0.049inch
R4 R5 R6: library part RMCF0805FT130R, "Res Thick Film 0805 130 Ohm 1% 0.125W(1/8W) ±100ppm/C Pad SMD Automotive T/R", Case/Package=0805, Case Code (Metric)=2012, Manufacturer 1="Stackpole Electronics", Max Operating Temperature=155°C, Max Power Dissipation=125mW, Min Operating Temperature=-55°C, Resistance=130R, Supplier Part Number 1=RMCF0805FT130RCT-ND, Temperature Coefficient=100ppm/°C, Tolerance=1%, Case Code (Imperial)=0805, ComponentLink1Description=https://datasheet.ciiva.com/15193/getdatasheetpartid-717599-15193532.pdf?src-supplier=Verical, ComponentLink1URL=https://datasheet.ciiva.com/15193/getdatasheetpartid-717599-15193532.pdf?src-supplier=Verical, Composition="Thick Film", Contact Plating=Tin,Matte, Depth=1.25mm, Features="Automotive AEC-Q200", Height=0.026inch, Length=2mm, Manufacturer Part Number 1=RMCF0805FT130R, Military Standard=Not, Mount="Surface Mount", Number of Terminations=2, Packaging="Tape and Reel", Pricing 1="1=0,10000, 10=0,02700, 100=0,01090, 1000=0,00490, 2500=0,00425 (USD)", Radiation Hardening=No, RoHS=Yes, Stock 1=11107, Supplier 1=Digi-Key, Width=0.049inch
R7 R8: library part RMCF0805FT280R, "Res Thick Film 0805 280 Ohm 1% 0.125W(1/8W) ±100ppm/C Pad SMD Automotive T/R", Case/Package=0805, Case Code (Metric)=2012, Manufacturer 1="Stackpole Electronics", Max Operating Temperature=155°C, Max Power Dissipation=125mW, Min Operating Temperature=-55°C, Resistance=280R, Supplier Part Number 1=RMCF0805FT280RCT-ND, Temperature Coefficient=100ppm/°C, Tolerance=1%, Case Code (Imperial)=0805, ComponentLink1Description=http://components.arrow.com/part/dataview/47832257S8035356N1174?src-supplier=Arrow, ComponentLink1URL=http://components.arrow.com/part/dataview/47832257S8035356N1174?src-supplier=Arrow, ComponentLink2Description=https://www.seielect.com/catalog/SEI-RMCF_RMCP.pdf?src-supplier=Avnet, ComponentLink2URL=https://www.seielect.com/catalog/SEI-RMCF_RMCP.pdf?src-supplier=Avnet, ComponentLink3Description=https://www.seielect.com/Catalog/SEI-RMCF_RMCP.pdf?src-supplier=Digi-Key, ComponentLink3URL=https://www.seielect.com/Catalog/SEI-RMCF_RMCP.pdf?src-supplier=Digi-Key, ComponentLink4Description=https://www.seielect.com/catalog/SEI-Packaging.pdf?src-supplier=Digi-Key, ComponentLink4URL=https://www.seielect.com/catalog/SEI-Packaging.pdf?src-supplier=Digi-Key, Composition="Thick Film", Contact Plating=Tin,Matte, Features="Automotive AEC-Q200", Height=0.026inch, Lead Free="Lead Free", Length=0.079inch, Manufacturer Part Number 1=RMCF0805FT280R, Mount="Surface Mount", Number of Terminations=2, Packaging="Tape and Reel", Pricing 1="1=0,10000, 10=0,02700, 100=0,01090, 1000=0,00490, 2500=0,00425 (USD)", Radiation Hardening=No, RoHS=Yes, Stock 1=4051, Supplier 1=Digi-Key, Width=0.049inch
SW1: library part PTS647SK70SMTR2LFS, "INWALL LENS COVER , WHITE , 6 (", Manufacturer="ITT C&K", Supplier Part Number 1=PTS647SK70SMTR2LFSCT-ND, Manufacturer Part Number=PTS647SK70SMTR2LFS, Pricing 1="1 = 0,14000, 10 = 0,14000, 25 = 0,13520, 50 = 0,13020, 100 = 0,12310, 250 = 0,11580, 500 = 0,11100 (USD)", RoHS=No, Stock 1=97905, Supplier 1=Digi-Key
U1: Case/Package=LQFP, Manufacturer 1=STMicroelectronics, Manufacturer_Part_Number=STM32G0_LQFP32_T1, Manufacturer Part Number 1=STM32G070KBT6, Max Frequency=64MHz, Max Operating Temperature=85°C, Max Supply Voltage=3.6V, Min Operating Temperature=-40°C, Min Supply Voltage=2V, Package Quantity=250, Supplier Part Number 1=511-STM32G070KBT6, Built_By=EMA_Jessica, ComponentLink1Description=https://datasheet.ciiva.com/71223/stm32g070cb-1517433-71223599.pdf?src-supplier=Mouser, ComponentLink1URL=https://datasheet.ciiva.com/71223/stm32g070cb-1517433-71223599.pdf?src-supplier=Mouser, Copyright="Copyright (C) 2016 Accelerated Designs. All rights reserved", Core Architecture=ARM, Data Bus Width=32b, Interface=I2C,SPI,I2S,USART,LIN, Memory Size=128KB, Memory Type=FLASH, Number of ADC Channels=13, Number of I/Os=29, Pricing 1="1=1,60000, 10=1,36000, 100=1,09000, 500=0,95700, 1000=0,79300, 2500=0,73800, 5000=0,71100, 10000=0,68300, 25000=0,65700 (USD)", RAM Size=36KB, RefDes=RefDes, RoHS=No, Stock 1=627, Supplier 1=Mouser, Type=DEV, Vendor=STMicroelectronics
U2: "IC USB SERIAL BASIC UART 16SSOP", Case/Package=SSOP, Manufacturer 1=FTDI, Max Frequency=64MHz, Max Operating Temperature=85°C, Max Supply Voltage=5.5V, Min Operating Temperature=-40°C, Min Supply Voltage=2.97V, Operating Supply Current=8mA, Operating Supply Voltage=5V, Package Quantity=3000, Supplier Part Number 1=768-1135-1-ND, ComponentLink1Description=https://datasheet.ciiva.com/1787/ds-ft230x-1787315.pdf?src-supplier=Digi-Key, ComponentLink1URL=https://datasheet.ciiva.com/1787/ds-ft230x-1787315.pdf?src-supplier=Digi-Key, ComponentLink2Description=https://datasheet.ciiva.com/4787/ds-ft230x-5395-4787571.pdf?src-supplier=Mouser, ComponentLink2URL=https://datasheet.ciiva.com/4787/ds-ft230x-5395-4787571.pdf?src-supplier=Mouser, ComponentLink3Description=https://datasheet.ciiva.com/30478/0900766b811020cb-30478167.pdf?src-supplier=RSComponents, ComponentLink3URL=https://datasheet.ciiva.com/30478/0900766b811020cb-30478167.pdf?src-supplier=RSComponents, ComponentLink4Description=https://datasheet.ciiva.com/1787/ft-x-series-1787316.pdf?src-supplier=Digi-Key, ComponentLink4URL=https://datasheet.ciiva.com/1787/ft-x-series-1787316.pdf?src-supplier=Digi-Key, ComponentLink5Description=https://datasheet.ciiva.com/1787/ft-x-series-1787317.pdf?src-supplier=Digi-Key, ComponentLink5URL=https://datasheet.ciiva.com/1787/ft-x-series-1787317.pdf?src-supplier=Digi-Key, ComponentLink6Description=https://datasheet.ciiva.com/71223/stm32g070cb-1517433-71223599.pdf?src-supplier=Mouser, ComponentLink6URL=https://datasheet.ciiva.com/71223/stm32g070cb-1517433-71223599.pdf?src-supplier=Mouser, Core Architecture=ARM, Data Bus Width=32b, Data Rate=12Mbps, Height=0.059inch, Interface=UART,USB, Length=5mm, Manufacturer Part Number 1=FT230XS-R, Memory Size=128KB, Memory Type=FLASH, Mount="Surface Mount", Number of ADC Channels=13, Number of Channels=1, Number of I/Os=29, Number of Pins=16, Packaging="Tape and Reel", Pricing 1="1=2,04000, 25=1,97000, 100=1,90000, 250=1,71000, 500=1,54000, 1000=1,48063 (USD)", RAM Size=36KB, RoHS=Yes, Stock 1=43316, Supplier 1=Digi-Key, Weight=0.004586oz, Width=0.157inch
U3: "LDO VOLT REG, 0.3A, 3.3V, SOT-23-5", Case/Package=SOT-23-5, Dropout Voltage=380mV, Manufacturer 1="Microchip Micrel", Max Input Voltage=5.5V, Max Operating Temperature=125°C, Max Output Current=300mA, Min Input Voltage=2.5V, Min Operating Temperature=-40°C, Nominal Output Voltage=3.3V, Operating Supply Current=42uA, Power Supply Rejection Ratio (PSRR)=60dB, Quiescent Current=38uA, Supplier Part Number 1=576-4764-1-ND, Accuracy=3%, ComponentLink1Description=https://datasheet.ciiva.com/46425/1856860-46425639.pdf?src-supplier=Element14, ComponentLink1URL=https://datasheet.ciiva.com/46425/1856860-46425639.pdf?src-supplier=Element14, Height=1.1mm, Length=2.9mm, Manufacturer Part Number 1=MIC5504-3.3YM5-TR, Mount="Surface Mount", Number of Outputs=1, Number of Pins=5, Output Current=300mA, Output Type=Fixed, Output Voltage=3.3V, Packaging="Tape and Reel", Pricing 1="1=0,11000, 25=0,09000 (USD)", REACH SVHC="No SVHC", RoHS=Yes, Stock 1=76136, Supplier 1=Digi-Key, Width=1.6mm
U4: "TRANSLATOR, VOLTAGE, 8BIT, 20TSSOP", Case/Package=TSSOP, High Level Output Current=-50mA, Low Level Output Current=50mA, Manufacturer 1="Texas Instruments", Max Operating Temperature=85°C, Max Supply Voltage=5.5V, Min Operating Temperature=-40°C, Min Supply Voltage=1.2V, Nominal Supply Current=8uA, Output Current=620uA, Package Quantity=1, Quiescent Current=3uA, Supplier Part Number 1=296-23011-1-ND, ComponentLink1Description=https://datasheet.ciiva.com/14287/txs0108e-14287280.pdf?src-supplier=Farnell, ComponentLink1URL=https://datasheet.ciiva.com/14287/txs0108e-14287280.pdf?src-supplier=Farnell, ComponentLink2Description=https://datasheet.ciiva.com/4834/sces642b-127094-4834401.pdf?src-supplier=Mouser, ComponentLink2URL=https://datasheet.ciiva.com/4834/sces642b-127094-4834401.pdf?src-supplier=Mouser, ComponentLink3Description=https://datasheet.ciiva.com/15096/getdatasheetpartid-322119-15096276.pdf?src-supplier=Verical, ComponentLink3URL=https://datasheet.ciiva.com/15096/getdatasheetpartid-322119-15096276.pdf?src-supplier=Verical, ComponentLink4Description=https://datasheet.ciiva.com/28653/1714661-28653429.pdf?src-supplier=Element14, ComponentLink4URL=https://datasheet.ciiva.com/28653/1714661-28653429.pdf?src-supplier=Element14, ComponentLink5Description=https://datasheet.ciiva.com/1899/txs0108e-1899604.pdf?src-supplier=Digi-Key, ComponentLink5URL=https://datasheet.ciiva.com/1899/txs0108e-1899604.pdf?src-supplier=Digi-Key, ComponentLink6Description=https://datasheet.ciiva.com/1899/txs0108e-1899605.pdf?src-supplier=Digi-Key, ComponentLink6URL=https://datasheet.ciiva.com/1899/txs0108e-1899605.pdf?src-supplier=Digi-Key, ComponentLink7Description=https://datasheet.ciiva.com/1899/txs0108e-1899606.pdf?src-supplier=Digi-Key, ComponentLink7URL=https://datasheet.ciiva.com/1899/txs0108e-1899606.pdf?src-supplier=Digi-Key, ComponentLink8Description=https://datasheet.ciiva.com/1508/1815244-1508732.pdf?src-supplier=Element14, ComponentLink8URL=https://datasheet.ciiva.com/1508/1815244-1508732.pdf?src-supplier=Element14, ComponentLink9Description=https://datasheet.ciiva.com/14287/txs0108e-14287532.pdf?src-supplier=Avnet, ComponentLink9URL=https://datasheet.ciiva.com/14287/txs0108e-14287532.pdf?src-supplier=Avnet, ComponentLink10Description=https://datasheet.ciiva.com/26039/txs0108e-26039599.pdf?src-supplier=Avnet+Europe, ComponentLink10URL=https://datasheet.ciiva.com/26039/txs0108e-26039599.pdf?src-supplier=Avnet+Europe, Contact Plating=Gold, Data Rate=60Mbps, Height=1.15mm, Lead Free="Lead Free", Length=6.5mm, Logic Function=Translator, Manufacturer Part Number 1=TXS0108EPWR, Mount="Surface Mount", Number of Bits=8, Number of Channels=8, Number of Inputs=8, Number of Pins=20, Output Type=Voltage, Packaging="Tape and Reel", Pricing 1="1=1,66000, 10=1,49000, 100=1,19790, 500=0,98416, 1000=0,81545 (USD)", Propagation Delay=4.8ns, Radiation Hardening=No, REACH SVHC="No SVHC", Rise Time=6.3ns, RoHS=Yes, Stock 1=31907, Supplier 1=Digi-Key, Termination=SMD/SMT, Turn-On Delay Time=312ns, Weight=0.002716oz, Width=4.4mm
Y1: library part KX2511A0032.768000, "OSCILLATOR XO 32.768KHZ CMOS SMD", Case/Package=SMD/SMT, Frequency=32.768kHz, Frequency Stability=20ppm, Manufacturer 1=Diodes, Max Operating Temperature=70°C, Max Supply Current=15uA, Min Operating Temperature=-20°C, Package Quantity=100, Supplier Part Number 1=KX2511A0032.768000-ND, ComponentLink1Description=https://datasheet.ciiva.com/18649/kx251-rev-c-18649469.pdf?src-supplier=Digi-Key, ComponentLink1URL=https://datasheet.ciiva.com/18649/kx251-rev-c-18649469.pdf?src-supplier=Digi-Key, Height=0.039inch, Length=0.098inch, Manufacturer Part Number 1=KX2511A0032.768000, Mount="Surface Mount", Packaging="Cut Strip", Pricing 1="1=1,42000, 10=1,35900, 50=1,32720, 100=1,13760, 500=1,10600, 1000=0,93220, 3000=0,88480, 6000=0,85320, 12000=0,82160 (USD)", RoHS=Yes, Stock 1=49, Supplier 1=Digi-Key, Width=0.079inch

## Free pads (board coordinates)
  round 0.1 hole 2.4 unplated: 2(5,3) 2(5,47) 2(50,3) 2(50,47)

## Via types
v1: diameter 0.45, hole 0.2, Top Layer to Bottom Layer, tented both sides, 2116 vias
v2: diameter 0.6, hole 0.4, Top Layer to Bottom Layer, tented both sides, 19 vias

## Nets (pads, with @x,y where several pads share a name; then routed paths per layer and width w, separated by ;. In a path a pad name is that pad's centre, name@x,y a point inside that pad or via, vN(x,y) a via of type N, cw(c..) or ccw(c..) an arc to the next point about the centre after c; other vN are vias at no path point)
3V3: C3.2 C4.2 C8.2 C9.2 C12.2 C15.2 C16.2 R4.1 R5.1 R6.1 U1.4 U3.5 U4.2 Y1.1 Y1.4
  other v1: 19.8,26.4 20.4,26.4 21,26.4 21.6,26.4 22.2,26.4 19.5,27 20.1,27 20.7,27 21.3,27 21.9,27 22.5,27 19.8,27.6 20.4,27.6 21,27.6 21.6,27.6 22.2,27.6 18.3,42.6 18.9,42.6 18,43.2 18.6,43.2 18.3,43.8 18.9,43.8 18,44.4 18.6,44.4
CBUS1: LED1.1 U2.14 | length 12.1
  Top Layer w0.254: LED1.1 31.85,13.85 32.834,12.866 33.234,12.866 v2(33.3,12.8) ; U2.14@36.752,14.454 36.752,14.717 37.535,15.5 v2(39.25,15.5)
  Bottom Layer w0.254: v2(33.3,12.8) 36.55,12.8 v2(39.25,15.5)
CBUS2: LED2.1 U2.7 | length 4.6
  Top Layer w0.254: LED2.1 31.8,20.475 32.4,21.075 33.868,21.075 34.212,20.731 U2.7
GND: C1.1 C2.1 C3.1 C4.1 C5.1 C6.1 C7.1 C8.1 C9.1 C10.1 C11.1 C12.1 C13.1 C14.1 C15.1 C16.1 D1.2 J1.4 J1.5 J1.6 J1.7 J1.8 J1.9 J1.10 J1.11 J2.6 J3.2 J4.3 J5.3 J6.3 J7.3 J8.3 J9.3 J10.3 J11.3 LED3.1 LED4.1 LED5.1 R3.1 SW1.1 SW1.2 U1.5 U2.5 U2.13 U3.2 U4.11 Y1.2